# EAGLE board DME_Board_1 (EAGLE 7.2.0)
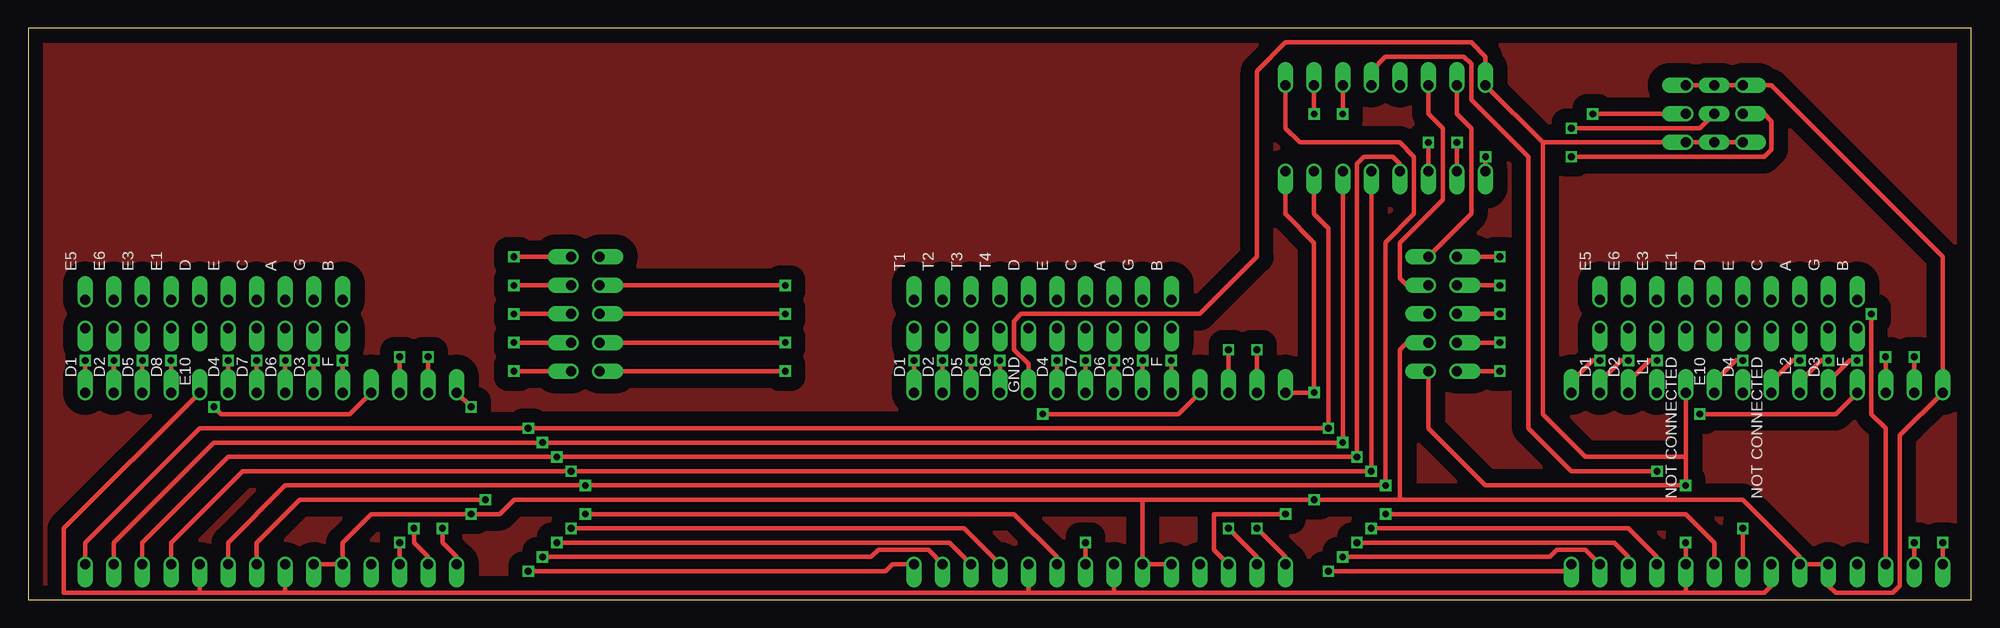
[diagram p0: board, top side]
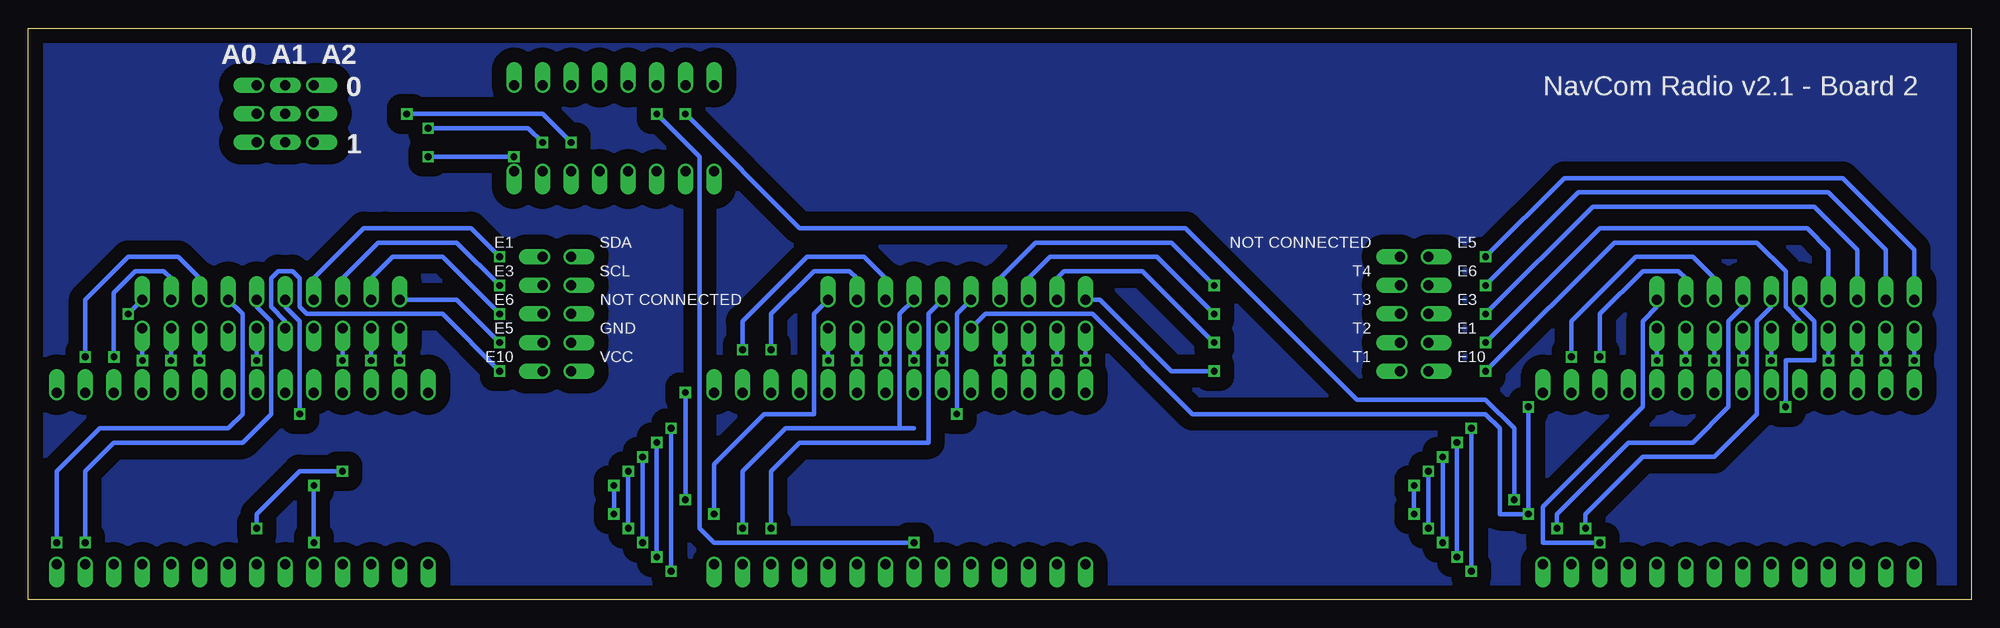
[diagram p1: board, bottom side, seen from below]

Size 172.72 x 50.8 mm. Coordinates in mm from the lower left corner, seen from the top.
Outline: 0,50.8 0,0 172.72,0 172.72,50.8 0,50.8
Copper layers (1*16): Top 0.035mm / dielectric 1.5mm / Bottom 0.035mm
Design rules "RadioStack_v2": minimum track width 0.2mm, minimum drill 0.4mm, track to track 0.2mm, track to pad 0.2mm, pad to pad 0.2mm, via to via 0.2mm, smd to smd 0.2mm, copper to edge 0.5mm, drill to drill 8mil, minimum pad ring 10mil, minimum via ring 8mil, stop-mask expansion 4mil, vias tented up to drill 0mil, thermal gap 10mil

## Footprints (pad centres in the part's own frame; a part is rotated, then mirrored left to right if it is on the bottom)
LISTA_2X10 = drill 0.889 pad 1.27 offset: 1 0,0; 2 0,-2.54; 3 0,-5.08; 4 0,-7.62; 5 0,-10.16; 6 0,-12.7; 7 0,-15.24; 8 0,-17.78; 9 0,-20.32; 10 0,-22.86; 11 2.54,-22.86; 12 2.54,-20.32; 13 2.54,-17.78; 14 2.54,-15.24; 15 2.54,-12.7; 16 2.54,-10.16; 17 2.54,-7.62; 18 2.54,-5.08; 19 2.54,-2.54; 20 2.54,0
ICM7228A = drill 0.889 pad 1.27 offset: P$1 0,0; P$2 0,-2.54 | drill 0.889 offset: P$3 0,-5.08; P$4 0,-7.62; P$5 0,-10.16; P$6 0,-12.7; P$7 0,-15.24; P$8 0,-17.78; P$9 0,-20.32; P$10 0,-22.86; P$11 0,-25.4; P$12 0,-27.94; P$13 0,-30.48; P$14 0,-33.02; P$15 15.24,-33.02; P$16 15.24,-30.48; P$17 15.24,-27.94; P$18 15.24,-25.4; P$19 15.24,-22.86; P$20 15.24,-20.32; P$21 15.24,-17.78; P$22 15.24,-15.24; P$23 15.24,-12.7; P$24 15.24,-10.16; P$25 15.24,-7.62; P$26 15.24,-5.08; P$27 15.24,-2.54; P$28 15.24,0
LISTA_2X5 = drill 0.889 pad 1.27 offset: 1 0,0; 2 0,-2.54; 3 0,-5.08; 4 0,-7.62; 5 0,-10.16; 6 2.54,-10.16; 7 2.54,-7.62; 8 2.54,-5.08; 9 2.54,-2.54; 10 2.54,0
PCF8574A = drill 0.889 pad 1.27 offset: A0 0,0; A1 0,-2.54; A2 0,-5.08; P0 0,-7.62; P1 0,-10.16; P2 0,-12.7; P3 0,-15.24; P4 7.62,-17.78; P5 7.62,-15.24; P6 7.62,-12.7; P7 7.62,-10.16; SCL 7.62,-5.08; SDA 7.62,-2.54; VDD 7.62,0; VSS 0,-17.78; ~INT 7.62,-7.62
ADRESA_0..2 = drill 0.889 pad 1.27 offset: P$1 0,0; P$2 0,-2.54; P$3 0,-5.08; P$7 5.08,0; P$8 5.08,-2.54; P$9 5.08,-5.08 | drill 0.889 pad 1.27 long: P$4 2.54,-5.08; P$5 2.54,-2.54; P$6 2.54,0

## Placement (x,y rotation side)
U$1  LISTA_2X10  [LISTA_2X10]  5.08,24.13 90 top
U$2  LISTA_2X10  [LISTA_2X10]  78.74,24.13 90 top
U$3  LISTA_2X10  [LISTA_2X10]  139.7,24.13 90 top
U$4  ICM7228A  [ICM7228A]  38.1,3.17 90 bottom
U$5  ICM7228A  [ICM7228A]  111.76,3.17 90 bottom
U$6  ICM7228A  [ICM7228A]  170.18,3.17 90 bottom
U$7  LISTA_2X5  [LISTA_2X5]  48.26,30.48 0 top
U$9  PCF8574A  [PCF8574A]  129.54,38.1 90 bottom
U$11  ADRESA_0..2  [ADRESA_0..2]  152.4,40.64 180 top
U$27  LISTA_2X5  [LISTA_2X5]  124.46,30.48 0 top

## Library data of the parts
U$1-U$7 U$9 U$11 U$27 = RadioStack_v2

## Nets
GND: U$2.5 U$4.P$5 U$4.P$6 U$4.P$28 U$5.P$5 U$5.P$6 U$5.P$28 U$6.P$5 U$6.P$6 U$6.P$28 U$9.VSS U$11.P$3 U$11.P$4 U$11.P$9 U$27.4
N$1: U$1.1 U$4.P$15
N$2: U$2.1 U$5.P$15
N$3: U$1.2 U$4.P$16
N$4: U$1.3 U$4.P$17
N$5: U$1.4 U$4.P$18
N$6: U$1.11 U$4.P$3
N$7: U$1.6 U$4.P$20
N$8: U$1.7 U$4.P$21
N$9: U$1.8 U$4.P$22
N$10: U$1.9 U$4.P$23
N$11: U$1.10 U$4.P$24
N$12: U$1.12 U$4.P$26
N$13: U$1.13 U$4.P$27
N$14: U$2.2 U$5.P$16
N$15: U$2.3 U$5.P$17
N$16: U$2.4 U$5.P$18
N$17: U$3.1 U$6.P$15
N$18: U$2.6 U$5.P$20
N$19: U$2.7 U$5.P$21
N$20: U$2.8 U$5.P$22
N$21: U$2.9 U$5.P$23
N$22: U$2.10 U$5.P$24
N$23: U$3.2 U$6.P$16
N$24: U$3.3 U$6.P$17
N$26: U$3.6 U$6.P$20
N$28: U$3.8 U$6.P$22
N$29: U$3.9 U$6.P$23
N$30: U$3.10 U$6.P$24
N$31: U$2.16 U$5.P$25
N$32: U$2.12 U$5.P$26
N$33: U$2.13 U$5.P$27
N$34: U$3.16 U$6.P$25
N$35: U$3.12 U$6.P$26
N$36: U$3.13 U$6.P$27
N$37: U$1.14 U$4.P$1
N$38: U$1.15 U$4.P$2
N$39: U$1.16 U$4.P$25
N$40: U$4.P$14 U$5.P$14 U$6.P$14 U$9.P3
N$41: U$4.P$13 U$5.P$13 U$6.P$13 U$9.P2
N$42: U$4.P$12 U$5.P$12 U$6.P$12 U$9.P0
N$43: U$4.P$11 U$5.P$11 U$6.P$11 U$9.P1
N$44: U$4.P$9 U$5.P$9 U$6.P$9 U$9.P4
N$45: U$2.14 U$5.P$1
N$46: U$2.15 U$5.P$2
N$47: U$9.A0 U$11.P$2
N$48: U$3.14 U$6.P$1
N$49: U$3.15 U$6.P$2
N$50: U$9.A1 U$11.P$5
N$52: U$3.11 U$6.P$3
N$53: U$2.11 U$5.P$3
N$55: U$9.A2 U$11.P$8
N$60: U$6.P$8 U$9.P7
N$61: U$5.P$8 U$9.P6
N$62: U$4.P$8 U$9.P5
N$63: U$1.20 U$7.1
N$64: U$4.P$7 U$4.P$10 U$4.P$19 U$5.P$7 U$5.P$10 U$5.P$19 U$6.P$7 U$6.P$10 U$6.P$19 U$9.VDD U$11.P$1 U$11.P$6 U$11.P$7 U$27.5
N$65: U$1.19 U$7.2
N$66: U$1.18 U$7.3
N$67: U$1.17 U$7.4
N$68: U$1.5 U$7.5
N$69: U$2.20 U$7.6
N$70: U$2.19 U$7.7
N$71: U$2.18 U$7.8
N$72: U$2.17 U$7.9
N$73: U$9.SDA U$27.1
N$74: U$9.SCL U$27.2
N$75: U$3.17 U$27.10
N$76: U$3.18 U$27.9
N$77: U$3.5 U$27.6
N$78: U$3.19 U$27.8
N$79: U$3.20 U$27.7

## Tracks (layer width: path | path; a pad name or v marks a point on that pad's centre or on a via)
GND  (via drill 0.6)
  Top 0.406: U$4.P$6 U$4.P$5 27.94,5.08 30.48,7.62 v39.37,7.62 41.91,7.62 43.18,8.89 99.06,8.89 | U$5.P$5 U$5.P$6 99.06,8.89 | U$11.P$9 U$11.P$4 U$11.P$3 154.94,45.72 170.18,30.48 U$6.P$28 166.37,14.61 166.37,1.27 165.74,0.64 160.66,0.64 160.02,1.27 U$6.P$5 U$6.P$6 157.48,3.81 152.4,8.89 121.92,8.89 | U$4.P$28 v39.37,17.14 | U$9.VSS 111.76,34.29 114.3,31.75 v114.3,18.41 U$5.P$28 | 99.06,8.89 v114.3,8.89 121.92,8.89 | U$27.4 122.56,22.86 121.92,22.23 121.92,8.89
  Bottom 0.406: U$2.5 87.63,25.4 78.11,25.4 69.22,16.51 43.18,16.51 41.91,15.24 41.91,7.62 v39.37,7.62 v39.37,17.14 | v114.3,8.89 v114.3,18.41
N$1  (via drill 0.6)
  Top 0.406: v5.08,21.27 U$4.P$15
  Bottom 0.406: U$1.1 v5.08,21.27
N$2  (via drill 0.6)
  Top 0.406: U$5.P$15 v78.74,21.27
  Bottom 0.406: v78.74,21.27 U$2.1
N$3  (via drill 0.6)
  Top 0.406: v7.62,21.27 U$4.P$16
  Bottom 0.406: U$1.2 v7.62,21.27
N$4  (via drill 0.6)
  Top 0.406: v10.16,21.27 U$4.P$17
  Bottom 0.406: U$1.3 v10.16,21.27
N$5  (via drill 0.6)
  Top 0.406: v12.7,21.27 U$4.P$18
  Bottom 0.406: U$1.4 v12.7,21.27
N$6  (via drill 0.6)
  Top 0.406: U$4.P$3 v33.02,5.08
  Bottom 0.406: v33.02,5.08 38.1,5.08 38.1,8.26 29.21,17.14 29.21,24.77 27.94,26.04 U$1.11
N$7  (via drill 0.6)
  Top 0.406: v17.78,21.27 U$4.P$20
  Bottom 0.406: U$1.6 v17.78,21.27
N$8  (via drill 0.6)
  Top 0.406: v20.32,21.27 U$4.P$21
  Bottom 0.406: U$1.7 v20.32,21.27
N$9  (via drill 0.6)
  Top 0.406: v22.86,21.27 U$4.P$22
  Bottom 0.406: U$1.8 v22.86,21.27
N$10  (via drill 0.6)
  Top 0.406: v25.4,21.27 U$4.P$23
  Bottom 0.406: U$1.9 v25.4,21.27
N$11  (via drill 0.6)
  Top 0.406: v27.94,21.27 U$4.P$24
  Bottom 0.406: U$1.10 v27.94,21.27
N$12  (via drill 0.6)
  Top 0.406: U$4.P$26 v33.02,21.59
  Bottom 0.406: v33.02,21.59 33.02,25.4 29.21,29.21 26.04,29.21 25.4,28.57 U$1.12
N$13  (via drill 0.6)
  Top 0.406: U$4.P$27 v35.56,21.59
  Bottom 0.406: v35.56,21.59 35.56,24.77 29.84,30.48 24.77,30.48 22.86,28.57 U$1.13
N$14  (via drill 0.6)
  Top 0.406: U$5.P$16 v81.28,21.27
  Bottom 0.406: v81.28,21.27 U$2.2
N$15  (via drill 0.6)
  Top 0.406: U$5.P$17 v83.82,21.27
  Bottom 0.406: v83.82,21.27 U$2.3
N$16  (via drill 0.6)
  Top 0.406: U$5.P$18 v86.36,21.27
  Bottom 0.406: v86.36,21.27 U$2.4
N$17  (via drill 0.6)
  Top 0.406: U$6.P$15 137.16,19.37 139.06,21.27 v139.7,21.27
  Bottom 0.406: v139.7,21.27 U$3.1
N$18  (via drill 0.6)
  Top 0.406: U$5.P$20 v91.44,21.27
  Bottom 0.406: v91.44,21.27 U$2.6
N$19  (via drill 0.6)
  Top 0.406: U$5.P$21 v93.98,21.27
  Bottom 0.406: v93.98,21.27 U$2.7
N$20  (via drill 0.6)
  Top 0.406: U$5.P$22 v96.52,21.27
  Bottom 0.406: v96.52,21.27 U$2.8
N$21  (via drill 0.6)
  Top 0.406: U$5.P$23 v99.06,21.27
  Bottom 0.406: v99.06,21.27 U$2.9
N$22  (via drill 0.6)
  Top 0.406: U$5.P$24 v101.6,21.27
  Bottom 0.406: v101.6,21.27 U$2.10
N$23  (via drill 0.6)
  Top 0.406: U$6.P$16 139.7,19.37 141.6,21.27 v142.24,21.27
  Bottom 0.406: v142.24,21.27 U$3.2
N$24  (via drill 0.6)
  Top 0.406: U$6.P$17 142.24,19.37 144.15,21.27 v144.78,21.27
  Bottom 0.406: v144.78,21.27 U$3.3
N$25
  pour Top (isolate 1.27): 1.27,49.53 171.45,49.53 171.45,1.27 1.27,1.27
N$26  (via drill 0.6)
  Top 0.406: U$6.P$20 149.86,19.37 151.76,21.27 v152.4,21.27
  Bottom 0.406: v152.4,21.27 U$3.6
N$27
  pour Bottom (isolate 1.27): 1.27,49.53 171.45,49.53 171.45,1.27 1.27,1.27
N$28  (via drill 0.6)
  Top 0.406: U$6.P$22 154.94,19.37 156.84,21.27 v157.48,21.27
  Bottom 0.406: v157.48,21.27 U$3.8
N$29  (via drill 0.6)
  Top 0.406: U$6.P$23 157.48,19.37 159.38,21.27 v160.02,21.27
  Bottom 0.406: v160.02,21.27 U$3.9
N$30  (via drill 0.6)
  Top 0.406: U$6.P$24 160.02,19.37 161.93,21.27 v162.56,21.27
  Bottom 0.406: v162.56,21.27 U$3.10
N$31  (via drill 0.6)
  Top 0.406: U$5.P$25 102.23,16.51 v90.17,16.51
  Bottom 0.406: v90.17,16.51 90.17,25.4 U$2.16
N$32  (via drill 0.6)
  Top 0.406: U$5.P$26 v106.68,22.23
  Bottom 0.406: v106.68,22.23 106.68,25.4 102.87,29.21 99.69,29.21 99.06,28.57 U$2.12
N$33  (via drill 0.6)
  Top 0.406: U$5.P$27 v109.22,22.23
  Bottom 0.406: U$2.13 96.52,28.57 98.42,30.48 103.5,30.48 109.22,24.77 v109.22,22.23
N$34  (via drill 0.6)
  Top 0.406: U$6.P$25 160.66,16.51 v148.59,16.51
  Bottom 0.406: v148.59,16.51 148.59,24.77 149.86,26.04 U$3.16
N$35  (via drill 0.6)
  Top 0.406: U$6.P$26 v165.1,21.59
  Bottom 0.406: v165.1,21.59 165.1,27.3 163.19,29.21 160.66,29.21 160.02,28.57 U$3.12
N$36  (via drill 0.6)
  Top 0.406: U$6.P$27 v167.64,21.59
  Bottom 0.406: v167.64,21.59 167.64,26.67 163.83,30.48 159.38,30.48 157.48,28.57 U$3.13
N$37  (via drill 0.6)
  Top 0.406: U$4.P$1 38.1,3.81 36.83,5.08 v36.83,6.35
  Bottom 0.406: v36.83,6.35 36.83,7.62 30.48,13.97 24.77,13.97 21.59,17.14 21.59,24.77 20.32,26.04 U$1.14
N$38  (via drill 0.6)
  Top 0.406: U$4.P$2 35.56,3.81 34.29,5.08 v34.29,6.35
  Bottom 0.406: v34.29,6.35 34.29,7.62 29.21,12.7 22.86,12.7 19.05,16.51 19.05,24.77 17.78,26.04 U$1.15
N$39  (via drill 0.6)
  Top 0.406: U$4.P$25 28.57,16.51 17.14,16.51 v16.51,17.14
  Bottom 0.406: v16.51,17.14 16.51,21.27 13.97,21.27 13.97,24.77 15.24,26.04 U$1.16
N$40  (via drill 0.6)
  Top 0.406: U$6.P$14 136.53,2.54 v115.57,2.54 | U$4.P$14 5.08,5.08 15.24,15.24 v44.45,15.24 v115.57,15.24 115.57,33.02 114.3,34.29 U$9.P3 | v44.45,2.54 76.2,2.54 76.83,3.17 U$5.P$14
  Bottom 0.406: v44.45,15.24 v44.45,2.54 | v115.57,2.54 v115.57,15.24
N$41  (via drill 0.6)
  Top 0.406: U$6.P$13 138.43,4.45 135.89,4.45 135.25,3.81 v116.84,3.81 | U$4.P$13 7.62,5.08 16.51,13.97 v45.72,13.97 v116.84,13.97 U$9.P2 | v45.72,3.81 74.93,3.81 75.56,4.45 80.01,4.45 U$5.P$13
  Bottom 0.406: v45.72,13.97 v45.72,3.81 | v116.84,3.81 v116.84,13.97
N$42  (via drill 0.6)
  Top 0.406: U$6.P$12 142.24,3.81 140.97,5.08 v118.11,5.08 | U$4.P$12 10.16,5.08 17.78,12.7 v46.99,12.7 v118.11,12.7 118.11,38.73 118.75,39.37 121.28,39.37 121.92,38.73 U$9.P0 | v46.99,5.08 81.92,5.08 U$5.P$12
  Bottom 0.406: v46.99,12.7 v46.99,5.08 | v118.11,5.08 v118.11,12.7
N$43  (via drill 0.6)
  Top 0.406: U$6.P$11 144.78,3.81 142.24,6.35 v119.38,6.35 | U$4.P$11 12.7,5.08 19.05,11.43 v48.26,11.43 v119.38,11.43 U$9.P1 | U$5.P$11 83.19,6.35 v48.26,6.35
  Bottom 0.406: v48.26,11.43 v48.26,6.35 | v119.38,11.43 v119.38,6.35
N$44  (via drill 0.6)
  Top 0.406: U$4.P$9 17.78,5.08 22.86,10.16 v49.53,10.16 v120.65,10.16 120.65,31.75 123.19,34.29 123.19,39.37 121.92,40.64 113.03,40.64 111.76,41.91 U$9.P4 | U$5.P$9 91.44,3.81 87.63,7.62 v49.53,7.62 | U$6.P$9 149.86,5.08 147.32,7.62 v120.65,7.62
  Bottom 0.406: v120.65,7.62 v120.65,10.16 | v49.53,10.16 v49.53,7.62
N$45  (via drill 0.6)
  Top 0.406: U$5.P$1 111.76,3.81 v109.22,6.35
  Bottom 0.406: v109.22,6.35 109.22,11.43 105.41,15.24 95.25,15.24 | 93.98,15.24 95.25,15.24 | 95.25,15.24 95.25,25.4 U$2.14
N$46  (via drill 0.6)
  Top 0.406: U$5.P$2 109.22,3.81 v106.68,6.35
  Bottom 0.406: U$2.15 92.71,25.4 92.71,13.97 104.14,13.97 106.68,11.43 v106.68,6.35
N$47  (via drill 0.6)
  Top 0.406: U$11.P$2 154.31,43.18 154.94,42.55 154.94,40.01 154.31,39.37 v137.16,39.37 | U$9.A0 v129.54,39.37
  Bottom 0.406: v129.54,39.37 v137.16,39.37
N$48  (via drill 0.6)
  Top 0.406: U$6.P$1 v170.18,5.08
  Bottom 0.406: U$3.14 153.67,25.4 153.67,16.51 154.94,15.24 166.37,15.24 170.18,11.43 v170.18,5.08
N$49  (via drill 0.6)
  Top 0.406: U$6.P$2 v167.64,5.08
  Bottom 0.406: U$3.15 152.4,26.04 151.13,24.77 151.13,16.51 153.67,13.97 165.1,13.97 167.64,11.43 v167.64,5.08
N$50  (via drill 0.6)
  Top 0.406: v137.16,41.91 148.59,41.91 U$11.P$5 | U$9.A1 v127,40.64
  Bottom 0.406: v127,40.64 128.27,41.91 v137.16,41.91
N$52  (via drill 0.6)
  Top 0.406: U$6.P$3 165.1,15.24 163.83,16.51 v163.83,25.4
  Bottom 0.406: v163.83,25.4 U$3.11
N$53  (via drill 0.6)
  Top 0.406: U$5.P$3 105.41,4.45 105.41,7.62 v111.76,7.62
  Bottom 0.406: v111.76,7.62 111.76,12.06 107.31,16.51 102.87,16.51 102.87,25.4 U$2.11
N$55  (via drill 0.6)
  Top 0.406: v139.06,43.18 U$11.P$8 | U$9.A2 v124.46,40.64
  Bottom 0.406: v124.46,40.64 127,43.18 v139.06,43.18
N$60  (via drill 0.6)
  Top 0.406: U$6.P$8 v152.4,6.35 | U$9.P7 119.38,46.99 120.65,48.26 127.64,48.26 128.27,47.62 128.27,44.45 133.35,39.37 133.35,15.24 137.16,11.43 v144.78,11.43
  Bottom 0.406: v152.4,6.35 152.4,7.62 148.59,11.43 v144.78,11.43
N$61  (via drill 0.6)
  Top 0.406: U$5.P$8 v93.98,5.08 | v116.84,43.18 U$9.P6
  Bottom 0.406: v93.98,5.08 111.76,5.08 113.03,6.35 113.03,39.37 v116.84,43.18
N$62  (via drill 0.6)
  Top 0.406: U$4.P$8 20.32,5.08 24.13,8.89 v40.64,8.89 | v114.3,43.18 U$9.P5
  Bottom 0.406: v40.64,8.89 40.64,15.24 43.18,17.78 54.61,17.78 69.85,33.02 104.14,33.02 v114.3,43.18
N$63  (via drill 0.6)
  Top 0.406: v43.18,30.48 U$7.1
  Bottom 0.406: U$1.20 5.08,31.11 11.43,37.47 36.2,37.47 v43.18,30.48
N$64  (via drill 0.6)
  Top 0.406: U$6.P$7 154.94,1.27 154.31,0.64 147.32,0.64 | 147.32,0.64 U$6.P$10 v147.32,5.08 | 147.32,0.64 96.52,0.64 | U$5.P$7 96.52,0.64 | 96.52,0.64 88.9,0.64 | U$5.P$10 88.9,0.64 | 88.9,0.64 22.86,0.64 | U$4.P$7 22.86,0.64 | 22.86,0.64 15.24,0.64 | 15.24,0.64 U$4.P$10 | U$11.P$1 U$11.P$6 U$11.P$7 134.62,40.64 | U$4.P$19 3.17,6.35 3.17,0.64 15.24,0.64 | U$5.P$19 88.9,20.95 87.63,22.23 87.63,24.77 88.27,25.4 104.14,25.4 109.22,30.48 109.22,46.99 111.76,49.53 128.27,49.53 129.54,48.26 U$9.VDD 134.62,40.64 | 134.62,40.64 134.62,16.51 138.43,12.7 147.32,12.7 | 147.32,12.7 v147.32,10.16 129.54,10.16 124.46,15.24 U$27.5 | U$6.P$19 147.32,12.7
  Bottom 0.406: v147.32,5.08 v147.32,10.16
N$65  (via drill 0.6)
  Top 0.406: U$7.2 v43.18,27.94
  Bottom 0.406: v43.18,27.94 34.92,36.2 12.7,36.2 7.62,31.11 U$1.19
N$66  (via drill 0.6)
  Top 0.406: v43.18,25.4 U$7.3
  Bottom 0.406: U$1.18 10.16,31.11 13.97,34.92 33.66,34.92 v43.18,25.4
N$67  (via drill 0.6)
  Top 0.406: U$7.4 v43.18,22.86
  Bottom 0.406: v43.18,22.86 33.02,33.02 14.61,33.02 12.7,31.11 U$1.17
N$68  (via drill 0.6)
  Top 0.406: v43.18,20.32 U$7.5
  Bottom 0.406: U$1.5 15.24,24.77 16.51,26.04 16.51,29.21 19.05,31.75 31.75,31.75 v43.18,20.32
N$69  (via drill 0.6)
  Top 0.406: U$7.6 v67.31,20.32
  Bottom 0.406: v67.31,20.32 71.12,20.32 77.47,26.67 U$2.20
N$70  (via drill 0.6)
  Top 0.406: v67.31,22.86 U$7.7
  Bottom 0.406: U$2.19 81.28,28.57 80.64,29.21 73.66,29.21 v67.31,22.86
N$71  (via drill 0.6)
  Top 0.406: U$7.8 v67.31,25.4
  Bottom 0.406: v67.31,25.4 72.39,30.48 81.92,30.48 83.82,28.57 U$2.18
N$72  (via drill 0.6)
  Top 0.406: v67.31,27.94 U$7.9
  Bottom 0.406: U$2.17 86.36,28.57 83.19,31.75 71.12,31.75 v67.31,27.94
N$73
  Top 0.406: U$9.SDA 127,43.18 128.27,41.91 128.27,34.29 U$27.1
N$74
  Top 0.406: U$9.SCL 124.46,43.18 125.73,41.91 125.73,35.56 121.92,31.75 121.92,28.57 122.56,27.94 U$27.2
N$75  (via drill 0.6)
  Top 0.406: v130.81,30.48 U$27.10
  Bottom 0.406: U$3.17 147.32,28.57 142.88,33.02 140.97,33.02 133.35,33.02 v130.81,30.48
N$76  (via drill 0.6)
  Top 0.406: U$27.9 v130.81,27.94
  Bottom 0.406: v130.81,27.94 134.62,31.75 139.7,31.75 141.6,31.75 144.78,28.57 U$3.18
N$77  (via drill 0.6)
  Top 0.406: v130.81,20.32 U$27.6
  Bottom 0.406: U$3.5 149.86,24.77 151.13,26.04 151.13,28.57 150.5,29.21 149.22,29.21 148.59,28.57 148.59,26.04 147.96,25.4 135.89,25.4 v130.81,20.32
N$78  (via drill 0.6)
  Top 0.406: v130.81,25.4 U$27.8
  Bottom 0.406: U$3.19 142.24,28.57 140.34,30.48 135.89,30.48 v130.81,25.4
N$79  (via drill 0.6)
  Top 0.406: U$27.7 v130.81,22.86
  Bottom 0.406: v130.81,22.86 134.62,26.67 U$3.20

## Text on the board
tPlace: E5 | E6 | E3 | E1 | D | E | C | A | G | B | T1 | T2 | T3 | T4 | D | E | C | A | G | B | E5 | E6 | E3 | E1 | D | E | C | A | G | B | D1 | D2 | D5 | D8 | E10 | D4 | D7 | D6 | D3 | F | D1 | D2 | D5 | D8 | GND | D4 | D7 | D6 | D3 | F | D1 | D2 | L1 | NOT CONNECTED | E10 | D4 | NOT CONNECTED | L2 | D3 | F
bPlace: A2 | A1 | A0 | NavCom Radio v2.1 - Board 2 | 0 | 1 | E5 | NOT CONNECTED | SDA | E1 | E6 | T4 | SCL | E3 | E3 | T3 | NOT CONNECTED | E6 | E1 | T2 | GND | E5 | E10 | T1 | VCC | E10